# Altium PCB ButtonInputBoard.PcbDoc
Units mm, origin at the board's own origin, x right, y up, seen from the top; angles counter-clockwise.
Board outline 32.03 x 81.28 mm, 2 copper layers (Top Layer, Bottom Layer); 27 components, 34 nets, 89 pads, 5 vias.
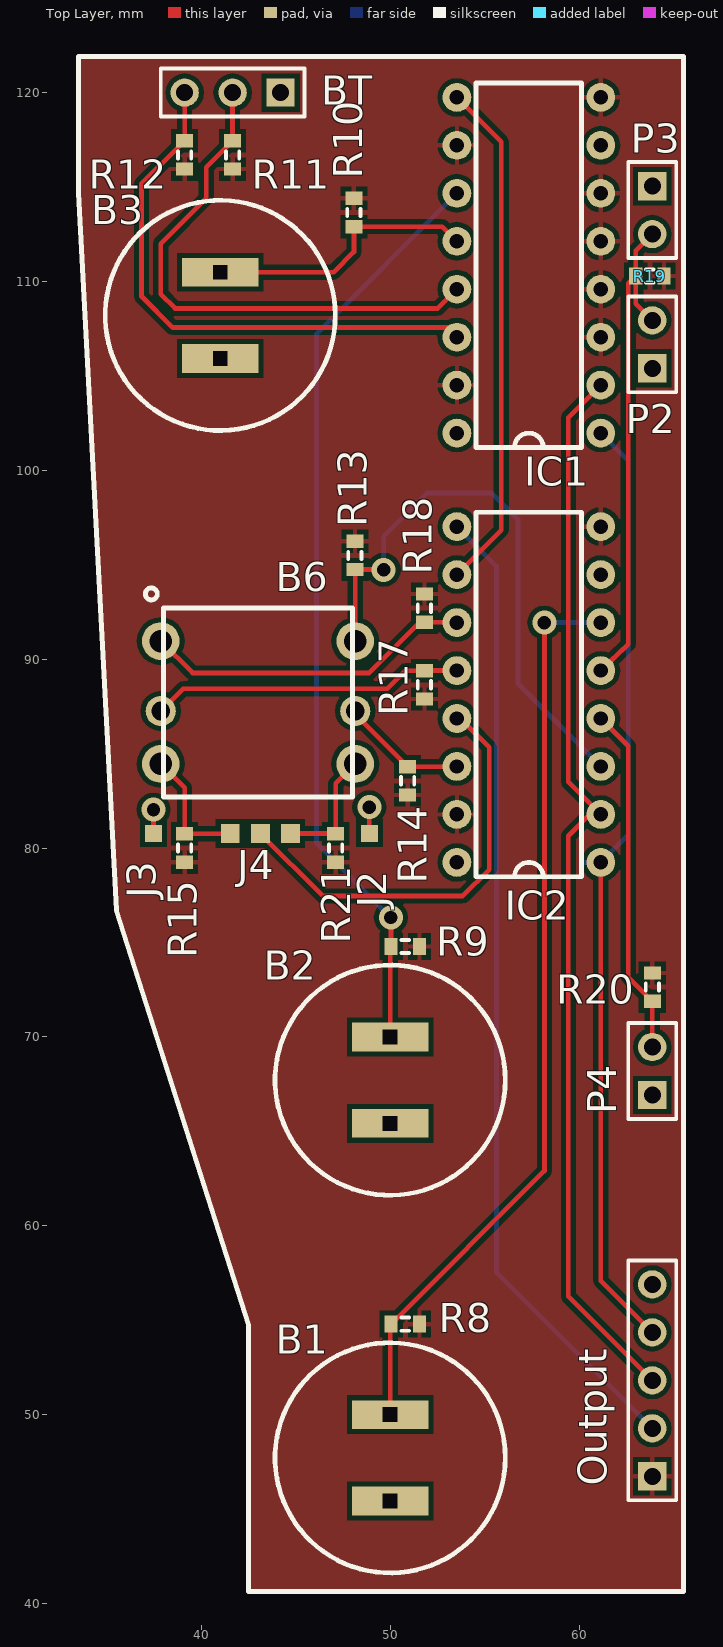
[diagram p0: Top Layer view]
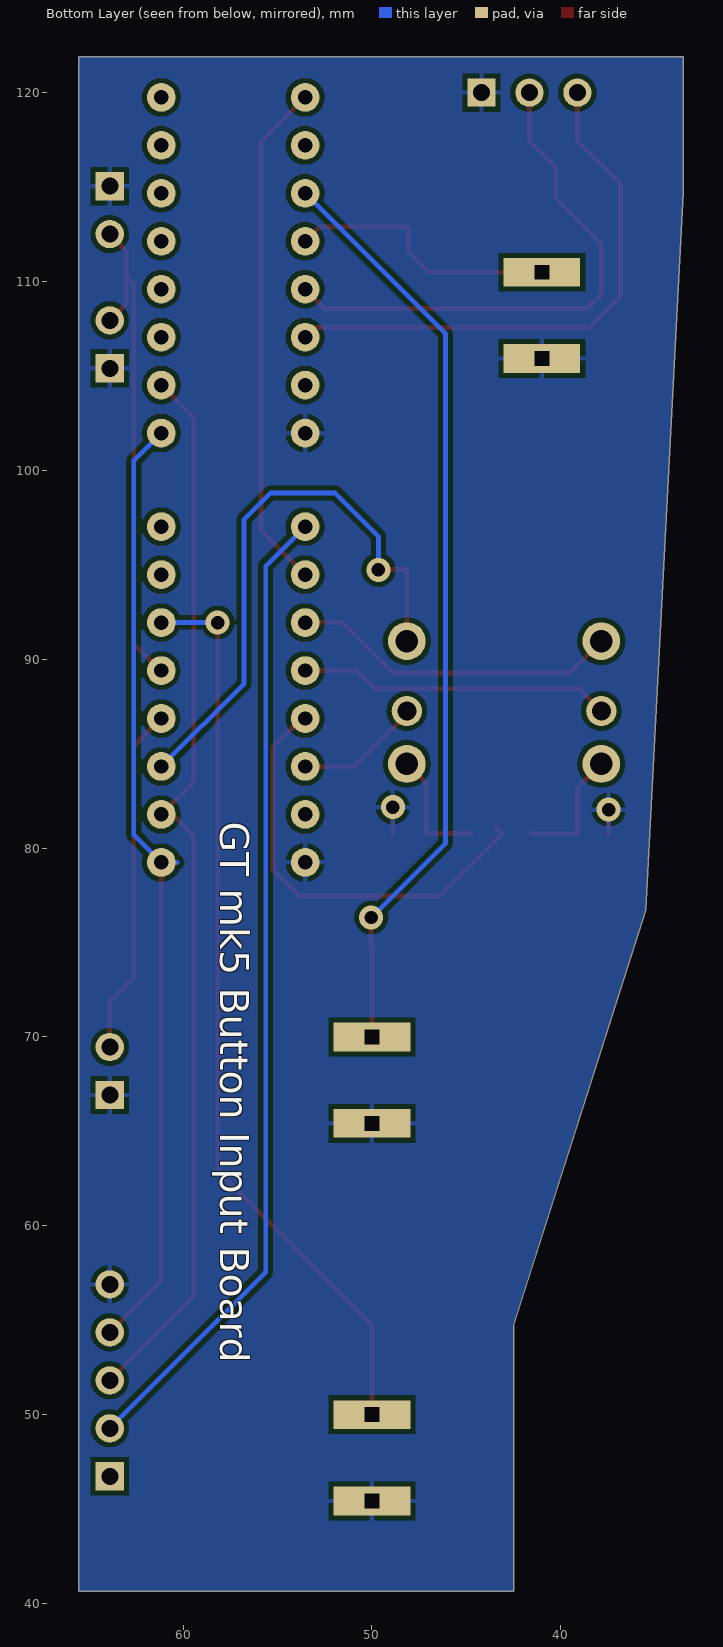
[diagram p1: Bottom Layer view, seen from below]

## Layer stack, top to bottom
Top Solder: solder mask 0.0102, Solder Resist, Dk 3.5
Top Layer: signal copper 0.0356
Dielectric 1: dielectric 0.32, FR-4, Dk 4.8
Bottom Layer: signal copper 0.0356
Bottom Solder: solder mask 0.0102, Solder Resist, Dk 3.5

## Board outline
35.5,76.714 33.5,114.714 33.5,121.92 65.532,121.92 65.532,40.64 42.5,40.64 42.5,54.714

## Design rules (kind name [scope] priority, off if disabled: settings)
Clearance [All] p1: gap=0.254
PolygonConnect [All] p1: connectstyle=Relief reliefconductorwidth=0.254 reliefentries=4 polygonreliefangle="90 Angle" airgapwidth=0.254
RoutingVias [All] p1: holewidth=0.711 width=1.27 viastyle="Through Hole" minholewidth=0.711 minwidth=1.27 maxholewidth=0.711 maxwidth=1.27
SolderMaskExpansion [All] p1: expansion=0.102
Width [All] p1: maxlimit=0.762 minlimit=0.254 preferedwidth=0.254
30 further rules are at their usual default settings.

## Components (designator, comment, footprint, x,y, rotation, side; value= is the part's Value field where it differs from the comment)
B1 "12mm PushButton" "12mm PushButton" 50,50 r0 top locked
B2 "12mm PushButton" "12mm PushButton" 50,70 r0 top locked
B3 "12mm PushButton" "12mm PushButton" 41,110.5 r0 top locked
B6 "SKQUCAA010" SKQUCAA010 37.85,84.464 r0 top locked
BT "Header 3" HDR1X3 44.196,120.015 r180 top
IC1 "CD74HC165E" SD74HC165E 61.154,119.761 r180 top
IC2 "CD74HC165E" SD74HC165E 61.154,97.028 r180 top
J2 "Pad" Pad 48.895,80.772 r0 top
J3 "Pad" Pad 37.465,80.772 r90 top
J4 "3 Jump" "3 Jump" 41.529,80.772 r0 top
Output "Header 5" HDR1X5 63.881,46.736 r90 top
P2 "Header 2" HDR1X2 63.881,105.41 r90 top
P3 "Header 2" HDR1X2 63.881,115.062 r270 top
P4 "Header 2" HDR1X2 63.881,66.929 r90 top
R8 "Res3" J1-0603 50.8,54.791 r0 top
R9 "Res3" J1-0603 50.8,74.791 r0 top
R10 "Res3" J1-0603 48.077,113.665 r90 top
R11 "Res3" J1-0603 41.656,116.713 r270 top
R12 "Res3" J1-0603 39.116,116.713 r270 top
R13 "Res3" J1-0603 48.133,95.504 r90 top
R14 "Res3" J1-0603 50.927,83.566 r270 top
R15 "Res3" J1-0603 39.116,80.01 r270 top
R17 "Res3" J1-0603 51.816,88.646 r270 top
R18 "Res3" J1-0603 51.816,92.71 r90 top
R19 "Res3" J1-0603 63.754,110.298 r0 top
R20 "Res3" J1-0603 63.881,72.644 r90 top
R21 "Res3" J1-0603 47.117,80.01 r270 top

## Footprints (in the part's own frame and the unit in brackets; to place one, negate y for a bottom-side part, rotate by r counter-clockwise, add the part's x,y. Pads: shape width x height; smd on the part's side, far side on the other; paste and mask are expansions set on the pad)
"3 Jump" [mm]
  rect 1x1 smd: 1(0,0) 2(1.6,0) 3(3.2,0)
"12mm PushButton" [mil]
  rect 160x60 hole 30 square: 0(0,0) 1(0,-180)
  silkscreen extent -240,-330 240,150
HDR1X2 [mm] "Connector; Header; 2 Position"
  rect 1.5x1.5 hole 0.9: 1(0,0)
  round 1.5 hole 0.9: 2(2.54,0)
  silkscreen extent -1.27,-1.27 3.81,1.27
HDR1X3 [mm] "Connector; Header; 3 Position"
  rect 1.5x1.5 hole 0.9: 1(0,0)
  round 1.5 hole 0.9: 2(2.54,0) 3(5.08,0)
  silkscreen extent -1.27,-1.27 6.35,1.27
HDR1X5 [mm] "Connector; Header; 5 Position"
  rect 1.5x1.5 hole 0.9: 1(0,0)
  round 1.5 hole 0.9: 2(2.54,0) 3(5.08,0) 4(7.62,0) 5(10.16,0)
  silkscreen extent -1.27,-1.27 11.43,1.27
J1-0603 [mm] "Chip Resistor, Body 1.6x0.8mm, IPC High Density"
  rect 0.7x0.9 smd: 1(-0.75,0) 2(0.75,0)
  silkscreen extent -0.2,-0.35 0.2,0.35, body extent -0.85,-0.48 0.85,0.48, height 0.9
Pad [mm]
  rect 0.9x0.9 smd: 1(0,0)
SD74HC165E [mil] "8-Bit Shift Register"
  round 60 hole 30: 1(0,700) 2(0,600) 3(0,500) 4(0,400) 5(0,300) 6(0,200) 7(0,100) 8(0,0) 9(300,0) 10(300,100) 11(300,200) 12(300,300) 13(300,400) 14(300,500) 15(300,600) 16(300,700)
  silkscreen extent 40,-30 260,730
SKQUCAA010 [mm] "4-direction with Center-push Function"
  round 2 hole 1.2: 1(0,6.5) 3(0,0) 4(10.3,0) 6(10.3,6.5)
  round 1.6 hole 1: 2(0,2.8) 5(10.3,2.8)
  silkscreen extent -0.82,-1.75 10.15,9.32

## Part data
BT: "Header, 3-Pin"
IC1 IC2: "8-Bit Shift Register"
Output: "Header, 5-Pin"
P2 P3 P4: "Header, 2-Pin"
R8 R9 R10 R11 R12 R13 R14 R15 R17 R18 R19 R20 R21: "Resistor"

## Via types
v1: diameter 1.27, hole 0.711, Top Layer to Bottom Layer, 5 vias

## Nets (pads, with @x,y where several pads share a name; then routed paths per layer and width w, separated by ;. In a path a pad name is that pad's centre, name@x,y a point inside that pad or via, vN(x,y) a via of type N, cw(c..) or ccw(c..) an arc to the next point about the centre after c; other vN are vias at no path point)
A: B6.1 IC2.11 R18.1 | length 17.5
  Top Layer w0.254: B6.1 39.533,89.281 48.895,89.281 51.574,91.96 R18.1 53.522,91.96 IC2.11
"A CLK": 
"A DT": 
"A SW": 
B: B6.2 IC2.12 R17.1 | length 16.6
  Top Layer w0.254: B6.2 39.031,88.445 49.849,88.445 50.8,89.396 R17.1 51.828,89.408 IC2.12
B1: B1.0 IC2.6 R8.1 | length 48.3
  Top Layer w0.254: B1.0 50,54.741 R8.1 58.166,62.907 v1(58.166,91.948)
  Bottom Layer w0.254: v1(58.166,91.948) IC2.6
B2: B2.0 IC1.11 R9.1 | length 49.4
  Top Layer w0.254: B2.0 50,74.741 R9.1 50.05,76.315 v1(50.038,76.327)
  Bottom Layer w0.254: v1(50.038,76.327) 46.101,80.264 46.101,107.248 IC1.11
B3: B3.0 IC1.12 R10.1 | length 14.6
  Top Layer w0.254: B3.0 47,110.5 48.077,111.577 R10.1 52.76,112.915 IC1.12
B4: BT.2 IC1.13 R11.1 | length 28.7
  Top Layer w0.254: BT.2 R11.1 40.259,116.066 40.259,114.427 37.846,112.014 37.846,109.347 38.608,108.585 52.518,108.585 IC1.13
B5: BT.3 IC1.14 R12.1 | length 29.3
  Top Layer w0.254: BT.3 R12.1 36.83,115.177 36.83,109.22 38.481,107.569 53.026,107.569 IC1.14
"B CLK": 
"B DT": 
"B SW": 
C: IC2.13 J4.2 | length 23.3
  Top Layer w0.254: J4.2@43.434,81.077 J4.2 46.431,77.47 53.848,77.47 55.245,78.867 55.245,85.344 53.721,86.868 IC2.13
CNTR: B6.6 IC2.3 R13.1 | length 30.6
  Top Layer w0.254: B6.6 48.15,94.737 R13.1 49.645,94.754 v1(49.657,94.742)
  Bottom Layer w0.254: v1(49.657,94.742) 49.657,96.52 51.943,98.806 55.372,98.806 56.769,97.409 56.769,88.713 IC2.3
D: B6.5 IC2.14 R14.1 | length 6.7
  Top Layer w0.254: B6.5@48.165,87.249 B6.5 48.15,87.093 R14.1 53.522,84.316 IC2.14
GND: IC1.3 IC1.4 IC1.5 IC1.6 IC1.8 IC1.10 IC1.15 IC2.8 IC2.15 Output.1 R8.2 R9.2 R10.2 R11.2 R12.2 R13.2 R14.2 R15.2 R17.2 R18.2 R19.2 R20.2 R21.2
NetB6_3: B6.3 J4.1 R15.1 | length 6.6
  Top Layer w0.254: B6.3 39.116,83.198 R15.1 41.517,80.76 J4.1
NetB6_4: B6.4 J4.3 R21.1 | length 6.5
  Top Layer w0.254: J4.3 47.105,80.772 R21.1 47.117,83.431 B6.4
NetBAT_1: 
NetBAT_2: 
NetBAT_4: 
NetBAT_6: 
NetD1_2: 
NetIC1_1: IC1.1 IC2.1 Output.4 | length 50.8
  Top Layer w0.254: IC2.1 61.154,57.083 Output.4
  Bottom Layer w0.254: 60.325,79.248 IC2.1 62.611,80.705 62.611,100.524 IC1.1
NetIC1_2: IC1.2 IC2.2 Output.3 | length 57
  Top Layer w0.254: IC1.2 59.436,102.803 59.436,83.506 IC2.2 60.579,81.788 59.436,80.645 59.436,56.261 Output.3
NetIC1_9: IC1.9 IC2.10 | length 27.2
  Top Layer w0.254: IC2.10 55.88,96.834 55.88,117.415 IC1.9
NetIC2_9: IC2.9 Output.2 | length 52
  Bottom Layer w0.254: IC2.9 55.626,94.936 55.626,57.531 Output.2
PAD1: IC2.5 P2.2 P3.2 R19.1 | length 27
  Top Layer w0.254: IC2.5 62.611,90.805 62.611,109.905 R19.1 ; P2.2 63.004,108.827 R19.1 ; P3.2 63.004,111.645 R19.1
PAD2: IC2.4 P4.2 R20.1 | length 18.5
  Top Layer w0.254: IC2.4 62.611,85.411 62.611,73.164 R20.1 P4.2
"SCREEN SCL": 
"SCREEN SDA": 
VBAT: 
VCC: B1.1 B2.1 B3.1 BT.1 IC1.16 IC2.16 J2.1 J3.1 Output.5 P2.1 P3.1 P4.1 | length 2.7
  Top Layer w0.254: J3.1 v1(37.465,82.042) ; J2.1 v1(48.895,82.169)
pads on no net: IC1.7 IC2.7

## Polygon pours and split planes (outlines as drawn)
GND on Top Layer "GND" (solid, pour order 0): 65.532,121.92 33.528,121.92 33.528,114.554 33.5,114.526 35.166,83.057 35.56,76.714 42.545,54.737 42.545,40.64 65.532,40.64
VCC on Bottom Layer "VCC" (solid, pour order 2): 33.528,121.92 33.528,114.681 35.56,76.708 42.545,54.737 42.545,40.64 65.532,40.64 65.532,121.92

## Silkscreen, mask and mechanical layers (free items; w line width, h text height)
Top Overlay:
  the board outline again, w0.254
Bottom Overlay:
  text "GT mk5 Button Input Board" at 58.039,81.407 h1.52 r90